# Altium PCB VR joypad.PcbDoc
Units mm, origin at the board's own origin, x right, y up, seen from the top; angles counter-clockwise.
Board outline 61.7 x 99.06 mm, 2 copper layers (Top Layer, Bottom Layer); 26 components, 25 nets, 153 pads, 14 vias.
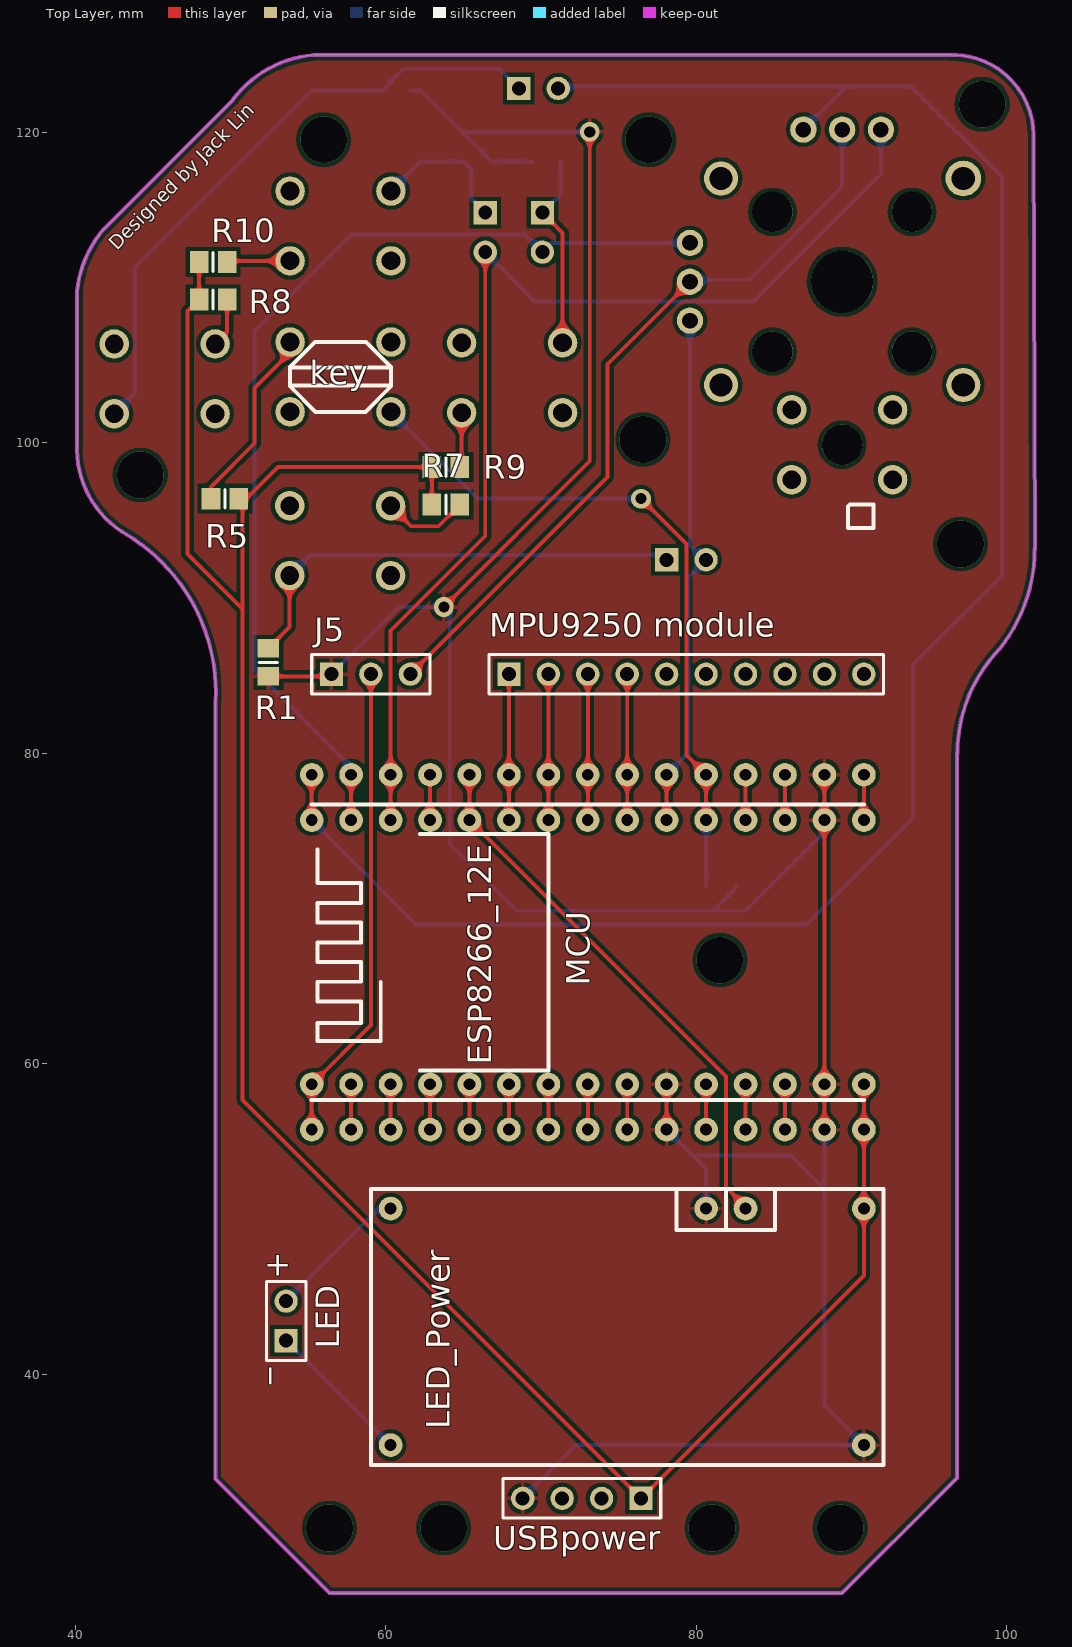
[diagram p0: Top Layer view]
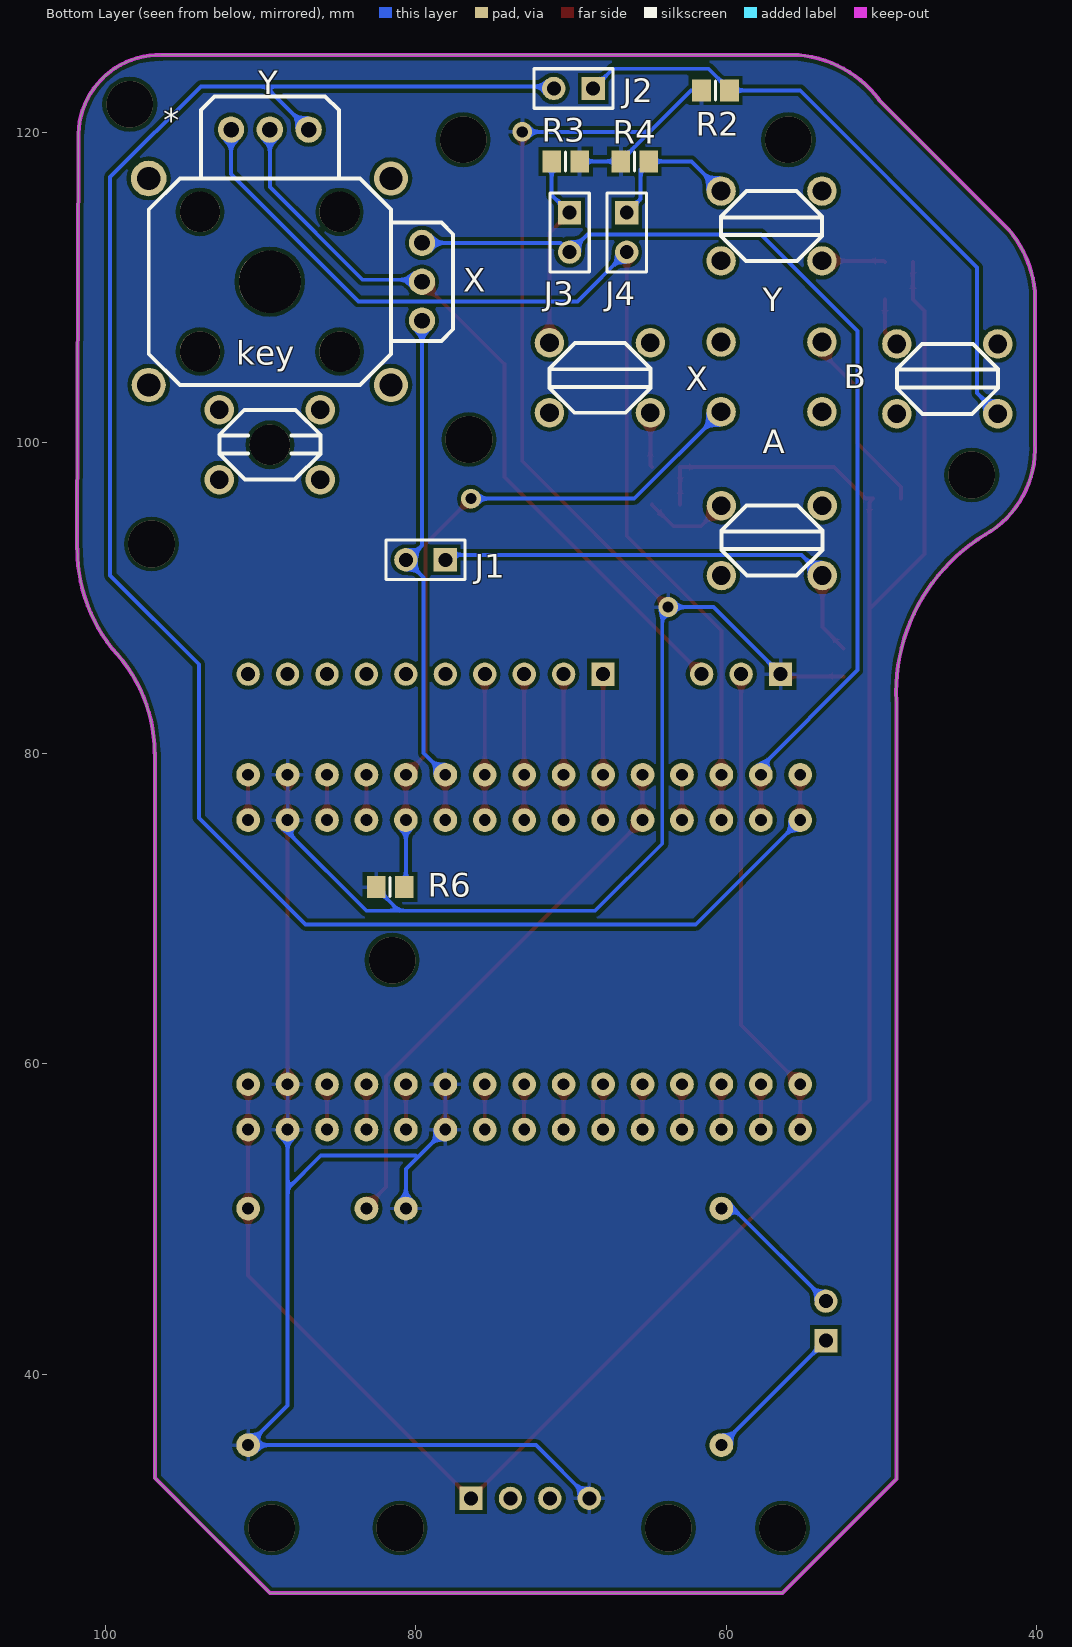
[diagram p1: Bottom Layer view, seen from below]

## Layer stack, top to bottom
Top Solder: solder mask 0.0102, Solder Resist, Dk 3.5
Top Layer: signal copper 0.0356
Dielectric 1: dielectric 0.32, FR-4, Dk 4.8
Bottom Layer: signal copper 0.0356
Bottom Solder: solder mask 0.0102, Solder Resist, Dk 3.5

## Board outline
49.045,33.251 56.388,25.908 89.408,25.908 91.757,28.258 93.662,30.162 96.805,33.305 96.805,80.01 96.827,80.01 cw(c106.617,79.947) 99.568,86.741 ccw(c91.504,93.154) 101.807,93.155 101.83,93.155 101.734,119.888 ccw(c96.523,119.758) 96.393,124.968 55.372,124.968 ccw(c55.973,117.74) 50.158,122.074 50.164,122.068 41.827,113.73 ccw(c47.351,109.031) 40.132,109.728 40.132,99.949 ccw(c46.545,99.632) 43.317,94.081 cw(c37.171,83.892) 49.057,83.331 49.045,83.331

## Design rules (kind name [scope] priority, off if disabled: settings)
Clearance [All] p1: gap=0.254
PolygonConnect [All] p1: connectstyle=Relief reliefconductorwidth=0.254 reliefentries=4 polygonreliefangle="90 Angle" airgapwidth=0.254
RoutingVias [All] p1: holewidth=0.711 width=1.27 viastyle="Through Hole" minholewidth=0.711 minwidth=1.27 maxholewidth=0.711 maxwidth=1.27
SolderMaskExpansion [All] p1: expansion=0.102
Width [All] p1: maxlimit=0.254 minlimit=0.254 preferedwidth=0.254
30 further rules are at their usual default settings.

## Components (designator, comment, footprint, x,y, rotation, side; value= is the part's Value field where it differs from the comment)
* "joystick" joystick 89.408,110.363 r180 bottom
A "key" "PCBComponent_1 - duplicate" 60.325,91.44 r180 bottom
B "key" "PCBComponent_1 - duplicate" 49.022,101.854 r180 bottom
J1 "Header 2" HDR1X2 78.105,92.456 r0 bottom
J2 "Header 2" HDR1X2 68.58,122.809 r0 bottom
J3 "Header 2" HDR1X2 70.104,114.808 r270 bottom
J4 "Header 2" HDR1X2 66.421,114.808 r270 bottom
J5 "Header 3" HDR1X3 56.515,85.09 r0 top
key "key" "PCBComponent_1 - duplicate" 53.848,101.981 r0 top
LED "LED" HDR1X2 53.594,42.164 r90 top
LED_Power "LED_Power" "PCBComponent_1 - duplicate1" 90.805,35.433 r90 top
MCU "WIFI" PCBComponent_1 90.805,55.753 r90 top
"MPU9250 module" "IIC" HDR1X10 67.945,85.09 r0 top
R1 "Res3" 6-0805_N 52.451,85.852 r90 top
R2 "Res3" 6-0805_N 60.706,122.682 r180 bottom
R3 "Res3" 6-0805_N 70.358,118.11 r0 bottom
R4 "Res3" 6-0805_N 65.913,118.11 r180 bottom
R5 "Res3" 6-0805_N 49.657,96.393 r180 top
R6 "Res3" 6-0805_N 81.661,71.374 r180 bottom
R7 "Res3" 6-0805_N 63.881,96.012 r0 top
R8 "Res3" 6-0805_N 48.895,109.22 r0 top
R9 "Res3" 6-0805_N 63.881,98.425 r0 top
R10 "Res3" 6-0805_N 48.895,111.633 r0 top
USBpower "USBpower" HDR1X4 76.454,32.004 r180 top
X "key" "PCBComponent_1 - duplicate" 64.897,106.426 r0 bottom
Y "key" "PCBComponent_1 - duplicate" 53.848,116.205 r0 bottom

## Footprints (in the part's own frame and the unit in brackets; to place one, negate y for a bottom-side part, rotate by r counter-clockwise, add the part's x,y. Pads: shape width x height; smd on the part's side, far side on the other; paste and mask are expansions set on the pad)
6-0805_N [mm] "Chip Resistor, Body 2.0x1.2mm, IPC Medium Density"
  rect 1.2x1.4 smd: 1(-0.9,0) 2(0.9,0)
  silkscreen extent 0,-0.6 0,0.6, body extent -1.07,-0.7 1.07,0.7, height 0.7
HDR1X2 [mm] "Connector; Header; 2 Position"
  rect 1.5x1.5 hole 0.9: 1(0,0)
  round 1.5 hole 0.9: 2(2.54,0)
  silkscreen extent -1.27,-1.27 3.81,1.27
HDR1X3 [mm] "Connector; Header; 3 Position"
  rect 1.5x1.5 hole 0.9: 1(0,0)
  round 1.5 hole 0.9: 2(2.54,0) 3(5.08,0)
  silkscreen extent -1.27,-1.27 6.35,1.27
HDR1X4 [mm] "Connector; Header; 4 Position"
  rect 1.5x1.5 hole 0.9: 1(0,0)
  round 1.5 hole 0.9: 2(2.54,0) 3(5.08,0) 4(7.62,0)
  silkscreen extent -1.27,-1.27 8.89,1.27
HDR1X10 [mm] "Connector; Header; 10 Position"
  rect 1.5x1.5 hole 0.9: 1(0,0)
  round 1.5 hole 0.9: 2(2.54,0) 3(5.08,0) 4(7.62,0) 5(10.16,0) 6(12.7,0) 7(15.24,0) 8(17.78,0) 9(20.32,0) 10(22.86,0)
  silkscreen extent -1.27,-1.27 24.13,1.27
joystick [mm]
  round 4 hole 4: 0(0,0)
  round 2.2 hole 1.5: 1(7.8,-6.65) 2(7.8,6.65) 4(-7.8,-6.65)
  round 2.3 hole 1.5: 3(-7.8,6.65)
  round 1.9 hole 1.2: 7(3.25,-8.25) 10(-3.25,-12.75) key_1(-3.25,-8.25) key_2(3.25,-12.75)
  round 2.6 hole 2.6: 11(4.5,4.5) 12(-4.5,4.5) 13(-4.5,-4.5) 14(4.5,-4.5) 15(0,-10.5)
  round 1.7 hole 1: GND_x(9.8,-2.5) GND_y(2.5,9.8) out_x(9.8,0) out_y(0,9.8) VCC_x(9.8,2.5) VCC_y(-2.5,9.8)
  silkscreen extent -7.8,-12.75 11.81,11.94
PCBComponent_1 [mil]
  round 60 hole 30: 3V3(900,0) A0(0,1400) CLK(0,600) CMD(0,800) D0(900,1400) D1(900,1300) D2(900,1200) D3(900,1100) D4(900,1000) D5(900,700) D6(900,600) D7(900,500) D8(900,400) EN(0,300) GND1(0,500) GND2(0,100) GND3(900,100) GND4(900,800) RST(0,200) RSV1(0,1300) RSV2(0,1200) RX(900,300) SD0(0,700) SD1(0,900) SD2(0,1000) SD3(0,1100) TX(900,200) VCC1(0,400) VCC2(900,900) Vin(0,0)
  silkscreen extent 75,0 825,1400
"PCBComponent_1 - duplicate" [mm]
  round 1.9 hole 1.2: 1(0,4.5) 2(6.5,4.5) 3(0,0) 4(6.5,0)
  silkscreen extent 0,0 6.5,4.5
"PCBComponent_1 - duplicate1" [mil]
  round 60 hole 30: LED+(600,1200) LED-(0,1200) PowerGND(600,400) PWM(600,300) VIN+(600,0) VIN-(0,0)
  silkscreen extent -50,-50 650,1250

## Part data
J1 J2 J3 J4: "Header, 2-Pin"
J5: "Header, 3-Pin"
LED: library part "Header 2", "Header, 2-Pin"
LED_Power: library part Power
MCU: library part Component_1
"MPU9250 module": library part "Header 10", "Header, 10-Pin"
R1 R2 R3 R4 R5 R6 R7 R8 R9 R10: "Resistor"
USBpower: library part "Header 4", "Header, 4-Pin"

## Free pads (board coordinates)
  round 1.524 hole 0.762: 8(88.265,75.692) 9(90.805,75.692) 10(85.725,75.692) 11(83.185,75.692) 12(80.645,75.692) 13(78.105,75.692) 14(75.565,75.692) 15(73.025,75.692) 16(70.485,75.692) 17(67.945,75.692) 18(65.405,75.692) 19(62.865,75.692) 20(60.325,75.692) 21(57.785,75.692) 22(55.245,75.692) 23(55.245,58.674) 24(57.785,58.674) 25(60.325,58.674) 26(62.865,58.674) 27(65.405,58.674) 28(67.945,58.674) 29(70.485,58.674) 30(73.025,58.674) 31(75.565,58.674) 32(78.105,58.674) 33(80.645,58.674) 34(83.185,58.674) 35(85.725,58.674) 36(88.265,58.674) 37(90.805,58.674)

## Via types
v1: diameter 3, hole 3, Top Layer to Bottom Layer, 11 vias
v2: diameter 1.27, hole 0.711, Top Layer to Bottom Layer, 3 vias

## Nets (pads, with @x,y where several pads share a name; then routed paths per layer and width w, separated by ;. In a path a pad name is that pad's centre, name@x,y a point inside that pad or via, vN(x,y) a via of type N, cw(c..) or ccw(c..) an arc to the next point about the centre after c; other vN are vias at no path point)
AD_INPUT: J5.2 MCU.A0 pad.23 | length 30.9
  Top Layer w0.254: MCU.A0 pad.23 59.055,62.484 J5.2
GND: J5.1 LED_Power.PowerGND LED_Power.VIN- MCU.GND1 MCU.GND2 MCU.GND3 pad.8 pad.32 pad.36 R1.1 R2.1 R3.1 R4.1 R6.1 USBpower.4 | length 199.3
  Top Layer w0.254: R1.1 56.377,84.952 J5.1 ; v2(63.754,89.408) 73.152,98.806 v2(73.152,120.015) ; MCU.GND1 pad.32 ; MCU.GND2 pad.36 pad.8 MCU.GND3
  Bottom Layer w0.254: J5.1 60.833,89.408 v2(63.754,89.408) 64.135,89.027 64.135,74.168 68.453,69.85 81.076,69.85 ; R2.1 62.28,122.682 64.947,120.015 ; USBpower.4 72.263,35.433 LED_Power.VIN- 88.265,37.973 MCU.GND2 88.265,54.229 ; R3.1 R4.1 66.813,118.149 64.947,120.015 ; v2(73.152,120.015) 64.947,120.015 ; MCU.GND1 80.645,53.213 LED_Power.PowerGND ; 80.01,54.102 86.106,54.102 88.265,51.943 ; R6.1 82.561,71.335 81.076,69.85 ; pad.8 88.265,74.93 83.185,69.85 81.076,69.85
JOYKEY_OUT: key.4 MCU.D8 pad.12 R6.2 | length 45.1
  Top Layer w0.254: v2(76.454,96.393) 79.375,93.472 79.375,79.883 MCU.D8 pad.12
  Bottom Layer w0.254: key.4 65.936,96.393 v2(76.454,96.393) ; R6.2@80.645,71.49 pad.12
JOYSTICK_INPUT: *.out_x *.out_y J5.3 | length 48.8
  Top Layer w0.254: J5.3 74.295,97.79 74.295,105.05 *.out_x
  Bottom Layer w0.254: *.out_x 79.735,110.49 83.439,110.49 89.408,116.459 *.out_y
"KEY_INPUT_1 / GND_X": *.GND_x J1.2 MCU.D7 pad.13 | length 33.2
  Top Layer w0.254: pad.13 MCU.D7
  Bottom Layer w0.254: MCU.D7 79.502,80.01 79.502,91.313 J1.2 ; *.GND_x 79.608,93.366 J1.2@80.2,92.773
"KEY_INPUT_2 / GND_Y": *.GND_y J2.2 MCU.D0 pad.22 | length 126.2
  Top Layer w0.254: pad.22 MCU.D0
  Bottom Layer w0.254: pad.22 61.976,68.961 87.122,68.961 93.98,75.819 93.98,85.725 99.695,91.44 99.695,117.094 93.853,122.936 89.681,122.936 ; J2.2 70.993,122.936 89.681,122.936 ; *.GND_y 89.681,122.936
"KEY_SCAN_1 / VCC_X": *.VCC_x J3.2 MCU.D1 pad.21 | length 65.4
  Top Layer w0.254: pad.21 MCU.D1
  Bottom Layer w0.254: MCU.D1 57.785,79.121 51.562,85.344 51.562,107.188 57.785,113.411 68.961,113.411 J3.2 70.699,112.863 *.VCC_x
"KEY_SCAN_2 / VCC_Y": *.VCC_y J4.2 MCU.D2 pad.20 | length 72.5
  Top Layer w0.254: MCU.D2@60.198,78.74 MCU.D2 ; pad.20 MCU.D2 ; J4.2 66.421,93.98 60.325,87.884 MCU.D2
  Bottom Layer w0.254: MCU.D2@60.198,78.74 MCU.D2 ; J4.2 69.596,109.093 79.097,109.093 79.098,109.094 83.694,109.094 91.908,117.308 *.VCC_y
LED_PIN: LED_Power.PWM MCU.D4 pad.18 | length 35.3
  Top Layer w0.254: MCU.D4 pad.18 81.915,59.182 81.915,52.07 83.185,50.8 LED_Power.PWM
NetA_1: A.1 R7.2 | length 5.6
  Top Layer w0.254: A.1 61.65,94.615 63.423,94.615 64.781,95.973 R7.2
NetA_4: A.4 J1.1 R1.2 | length 30.2
  Top Layer w0.254: R1.2 53.825,88.126 A.4
  Bottom Layer w0.254: A.4 55.156,92.771 77.79,92.771 J1.1
NetB_1: B.1 R8.2 | length 3.2
  Top Layer w0.254: B.1 49.795,107.127 R8.2
NetB_4: B.4 J2.1 R2.2 | length 40.6
  Bottom Layer w0.254: B.4 43.853,103.185 43.853,111.29 55.245,122.682 R2.2 59.806,122.721 61.164,124.079 67.31,124.079 J2.1
NetJ3_1: J3.1 R3.2 X.4 | length 12.7
  Top Layer w0.254: J3.1 71.397,113.515 X.4
  Bottom Layer w0.254: J3.1 71.258,115.962 R3.2
NetJ4_1: J4.1 R4.2 Y.4 | length 9.3
  Bottom Layer w0.254: Y.4 62.253,118.11 R4.2 65.532,117.591 65.532,115.697 J4.1
Netkey_1: key.1 R5.2 | length 12.2
  Top Layer w0.254: R5.2 48.757,97.155 51.562,99.96 51.562,103.505 53.848,105.791 key.1
NetLED_1: LED.1 LED_Power.LED- | length 9.5
  Bottom Layer w0.254: LED.1 LED_Power.LED-
NetLED_2: LED.2 LED_Power.LED+ | length 9.2
  Bottom Layer w0.254: LED.2 59.563,50.673 LED_Power.LED+
NetMCU_D5: "MPU9250 module.3" MCU.D5 pad.15 | length 9.4
  Top Layer w0.254: pad.15 MCU.D5 73.025,85.09
NetMCU_D6: "MPU9250 module.4" MCU.D6 pad.14 | length 9.4
  Top Layer w0.254: pad.14 MCU.D6 75.565,85.09
NetMCU_GND4: "MPU9250 module.2" MCU.GND4 pad.16 | length 9.4
  Top Layer w0.254: pad.16 MCU.GND4 70.485,85.09
NetMCU_VCC2: "MPU9250 module.1" MCU.VCC2 pad.17 | length 9.4
  Top Layer w0.254: pad.17 MCU.VCC2 67.945,85.09
NetR9_2: R9.2 X.1 | length 3.7
  Top Layer w0.254: R9.2 64.897,98.541 X.1
  Bottom Layer w0.254: X.1@64.77,101.799 X.1
NetR10_2: R10.2 Y.1 | length 4.1
  Top Layer w0.254: R10.2 49.867,111.705 Y.1
VIN: LED_Power.VIN+ MCU.Vin pad.37 R5.1 R7.1 R8.1 R9.1 R10.1 USBpower.1 | length 147.8
  Top Layer w0.254: R10.1 R8.1 47.244,108.469 47.244,92.837 50.8,89.281 ; R7.1 R9.1 53.086,98.425 51.054,96.393 R5.1 50.8,96.15 50.8,89.281 ; USBpower.1 50.8,57.658 50.8,89.281 ; USBpower.1@76.835,31.623 76.835,32.385 90.805,46.355 LED_Power.VIN+ MCU.Vin pad.37
pads on no net: "MPU9250 module.5" "MPU9250 module.6" "MPU9250 module.7" "MPU9250 module.8" "MPU9250 module.9" "MPU9250 module.10" *.0 *.1 *.2 *.3 *.4 *.7 *.10 *.11 *.12 *.13 *.14 *.15 *.key_1 *.key_2 A.2 A.3 B.2 B.3 key.2 key.3 MCU.3V3 MCU.CLK MCU.CMD MCU.D3 MCU.EN MCU.RST MCU.RSV1 MCU.RSV2 MCU.RX MCU.SD0 MCU.SD1 MCU.SD2 MCU.SD3 MCU.TX MCU.VCC1 USBpower.2 USBpower.3 X.2 X.3 Y.2 Y.3
copper on no net: | length 43.8
  Top Layer w0.254: 57.785,55.753 57.785,58.674 ; 60.325,55.753 60.325,58.674 ; 62.865,55.753 62.865,58.674 ; 62.865,75.692 62.865,78.613 ; 65.405,55.753 65.405,58.674 ; 67.945,55.753 67.945,58.674 ; 70.485,55.753 70.485,58.674 ; 73.025,55.753 73.025,58.674 ; 75.565,55.753 75.565,58.674 ; 80.645,55.753 80.645,58.674 ; 83.185,55.753 83.185,58.674 ; 83.185,75.692 83.185,78.613 ; 85.725,55.753 85.725,58.674 ; 85.725,75.692 85.725,78.613 ; 90.805,75.692 90.805,78.613
  other v1: 56.388,30.099 63.738,30.099 81.026,30.099 89.281,30.099 81.534,66.675 97.028,93.472 44.196,97.917 76.581,100.203 56.007,119.507 76.962,119.507 98.425,121.793

## Polygon pours and split planes (outlines as drawn)
GND on Top Layer "topGND" (solid, remove dead copper, pour order 8): 35.941,125.857 35.941,21.209 108.839,21.209 108.839,125.857 35.941,125.857
GND on Bottom Layer "bottomGND" (solid, remove dead copper, pour order 10): 40.005,125.095 40.005,25.4 102.235,25.4 102.235,125.095 40.005,125.095

## Keep-outs
Keep-Out Layer:
  lines w0.254: 49.045,83.331 49.045,33.251 56.388,25.908 89.408,25.908 91.757,28.258 93.662,30.162 96.805,33.305 96.805,80.01 ; 49.057,83.331 ccw(c37.171,83.892) 43.317,94.081 cw(c46.545,99.632) 40.132,99.949 40.132,109.728 cw(c47.351,109.031) 41.827,113.73 50.164,122.068 ; 50.158,122.074 cw(c55.973,117.74) 55.372,124.968 96.393,124.968 cw(c96.523,119.758) 101.734,119.888 101.83,93.155 ; 96.827,80.01 cw(c106.617,79.947) 99.568,86.741 ccw(c91.504,93.154) 101.807,93.155

## Silkscreen, mask and mechanical layers (free items; w line width, h text height)
Top Overlay:
  lines w0.254: 89.789,94.488 89.789,95.885 89.916,96.012 91.44,96.012 91.44,94.488 89.789,94.488
  text "Designed by Jack Lin" at 42.926,112.141 h1.52 r45.25
  text "+" at 52.197,46.355 h1.52
  text "_" at 52.197,39.37 h1.52 r90

## Text inside footprints (layer, text, board x,y; h text height)
*: Bottom Overlay "key" at 91.567,105.029 h1.52; Bottom Overlay "Y" at 90.17,122.428 h1.52; Bottom Overlay "X" at 76.962,109.728 h1.52
MCU: Top Overlay "ESP8266_12E" at 66.802,59.944 h1.52 r90